# Altium PCB MainBoard.PcbDoc
Units mil, origin at the board's own origin, x right, y up, seen from the top; angles counter-clockwise.
Board outline 2100.54 x 998.96 mil, 2 copper layers (Top Layer, Bottom Layer), stack 27.8 mil thick; 13 components, 10 nets, 38 pads, 2 vias.
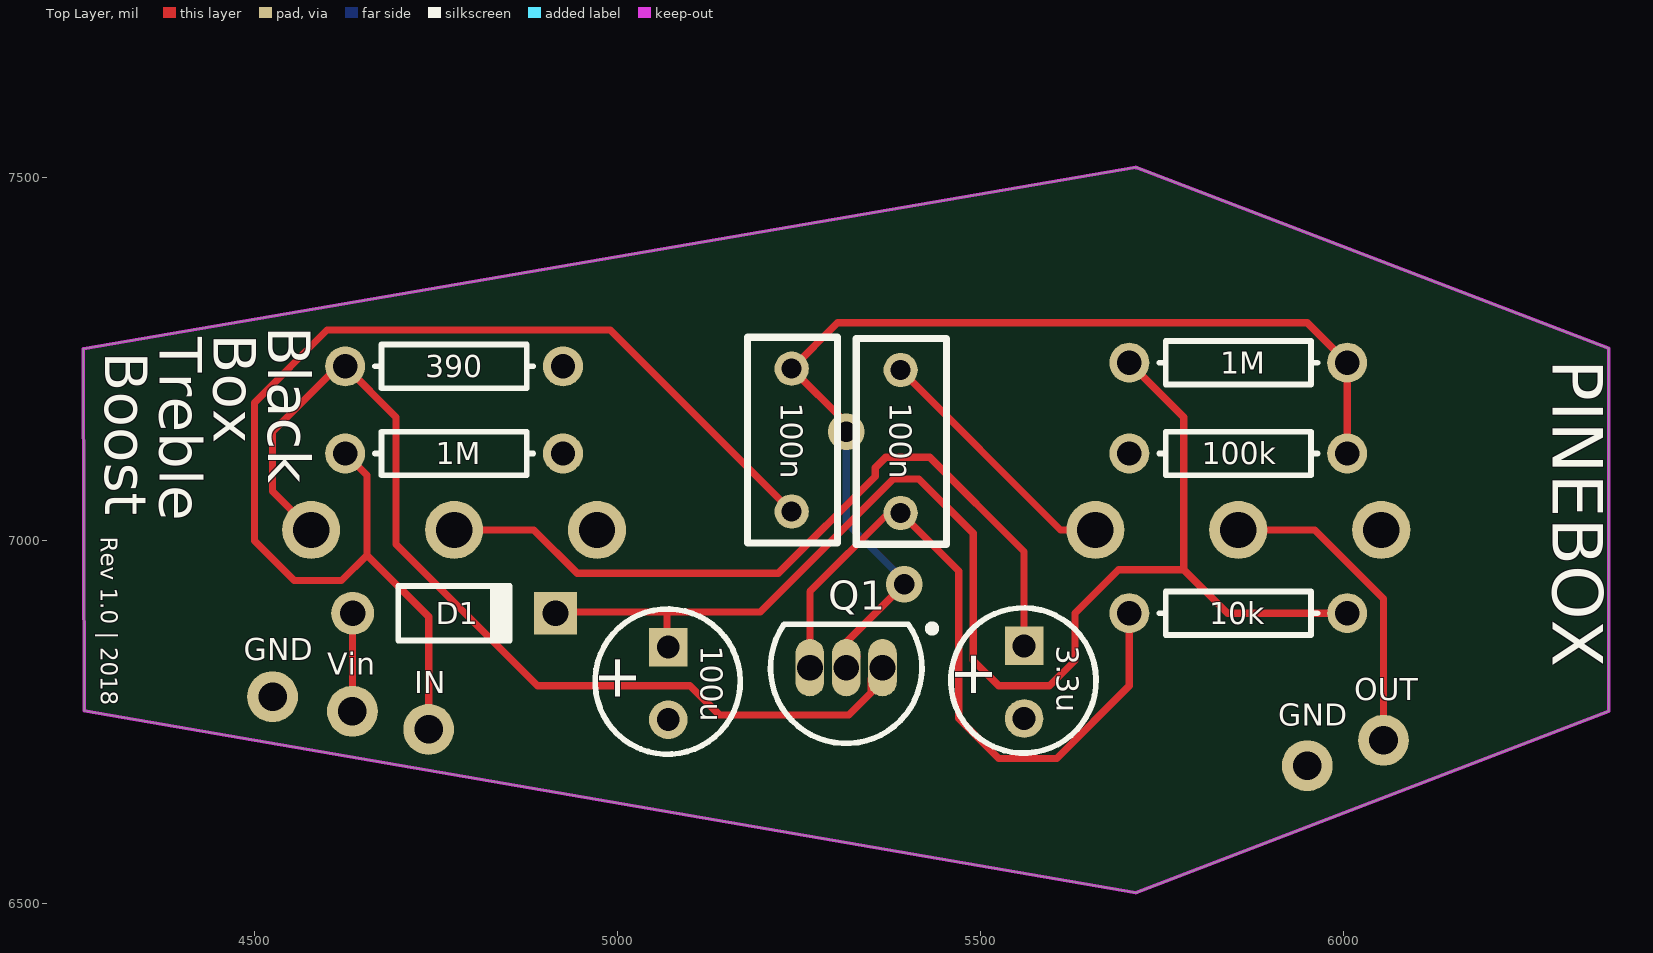
[diagram p0: Top Layer view]
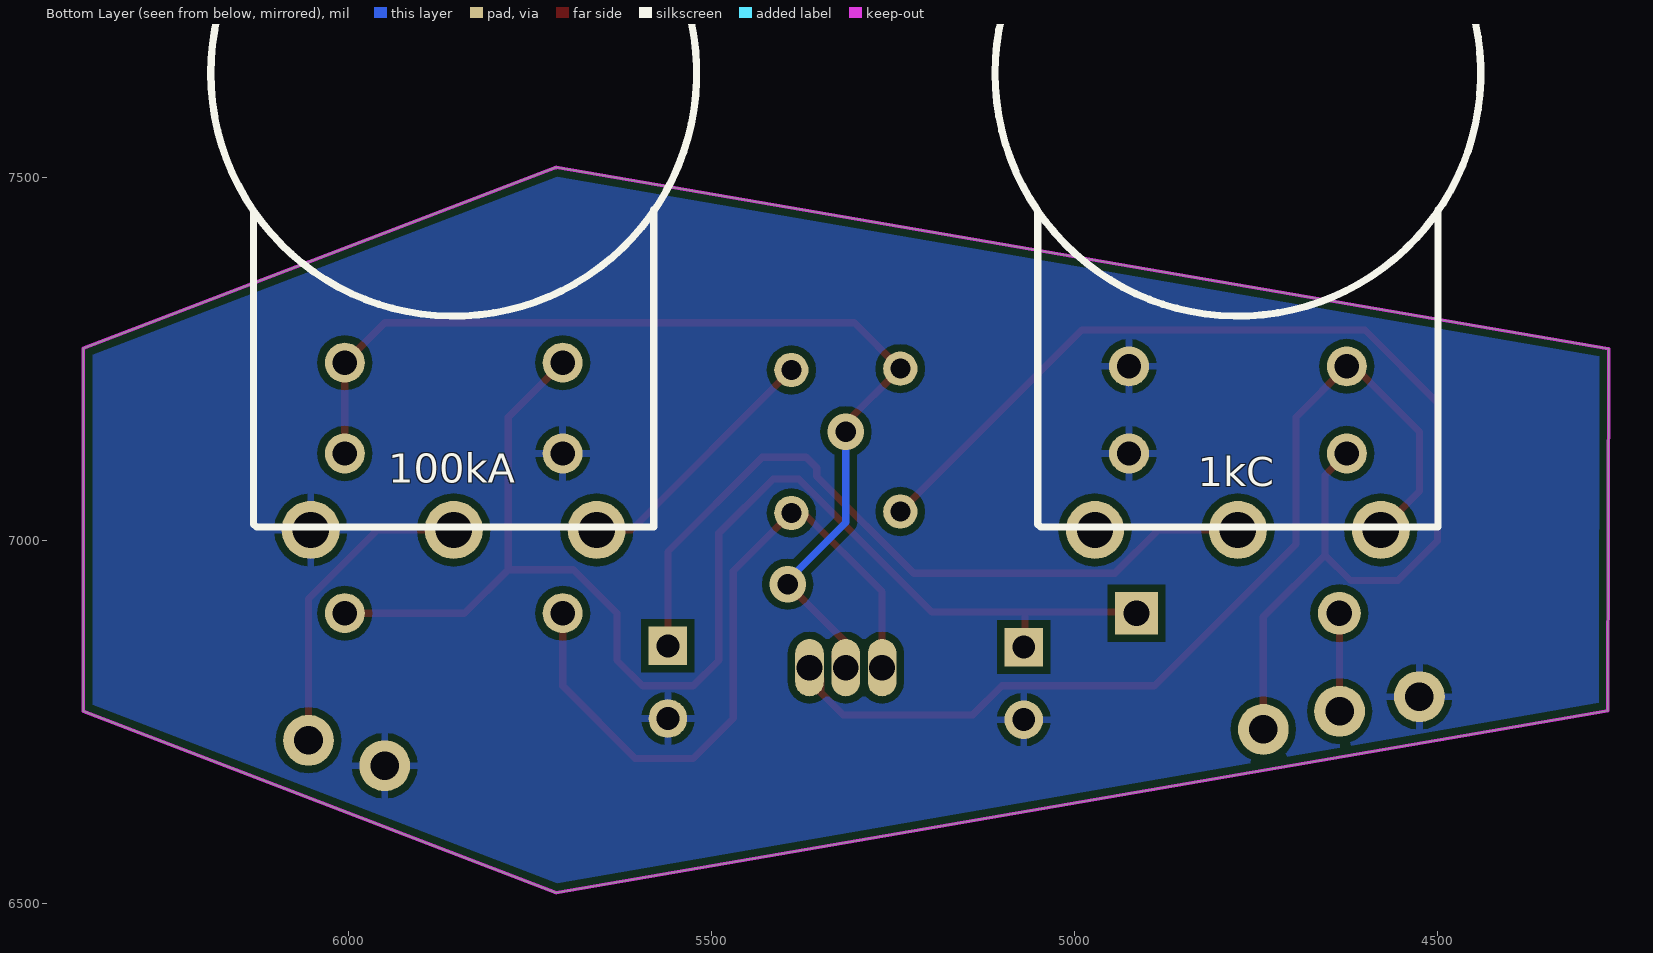
[diagram p1: Bottom Layer view, seen from below]

## Layer stack, top to bottom
Top Solder: solder mask 0.8, Solder Resist, Dk 3.5
Top Layer: signal copper 1.4
Dielectric 1: dielectric 25, FR-4, Dk 4.8
Bottom Layer: signal copper 1.4
Bottom Solder: solder mask 8, Solder Resist, Dk 3.5

## Board outline
4265.54,6765.77 5714.01,6515 6365,6765 6365,7265.11 5714.01,7513.96 4264.46,7264.34

## Design rules (kind name [scope] priority, off if disabled: settings)
Clearance [All] p1: gap=10 ignorepadtopadclearanceinfootprint=FALSE except(0: Arc-Hole Track-Hole SMDPad-Hole THPad-Hole Via-Hole Fill-Hole Poly-Hole Region-Hole Text-Hole)
ComponentClearance [All] p1: gap=0 collisioncheckmode=3 verticalgap=0 showdistances=FALSE
PolygonConnect [All] p1: connectstyle=Relief reliefconductorwidth=10 reliefentries=4 polygonreliefangle="90 Angle" airgapwidth=10
RoutingVias [All] p1: holewidth=28 width=50 viastyle="Through Hole" minholewidth=28 minwidth=50 maxholewidth=28 maxwidth=50
SilkToSilkClearance [All] p1: silktosilkclearance=8
SilkToSolderMaskClearance [IsPad] p1: minsilkscreentomaskgap=8 clearancetoexposedcopper=TRUE
SolderMaskExpansion [All] p1: expansion=4
Width [All] p1: maxlimit=10 minlimit=10 preferedwidth=10
27 further rules are at their usual default settings.

## Classes and differential pairs
component class TrebleBoost: 1kC 1M 3.3u 10k 100k 100kA 100n 100u 390 D1 Q1

## Components (designator, comment, footprint, x,y, rotation, side; value= is the part's Value field where it differs from the comment)
1kC "Pot-16mm" Pot-16mm 4775,7014.76 r180 bottom value=C1k (schematic designator VR1)
1M "Res1" AXIAL-0.3 4775,7120 r180 top value=1M (schematic designator R1)
1M "Res1" AXIAL-0.3 5855,7245 r180 top value=1M (schematic designator R2)
3.3u "Cap2" "Cap - Electrolytic" 5560,6805 r270 top value=2.2uF (schematic designator C4)
10k "Res1" AXIAL-0.3 5855,6900 r0 top value=10k (schematic designator R4)
100k "Res1" AXIAL-0.3 5855,7120 r0 top value=100k (schematic designator R3)
100kA "Pot-16mm" Pot-16mm 5855,7014.76 r180 bottom value=A10k (schematic designator VR2)
100n "Wima Capacitor" "Cap-0.2\"" 5240,7040 r90 top value=100n (schematic designator C3)
100n "Wima Capacitor" "Cap-0.2\"" 5390,7038.15 r90 top value=100n (schematic designator C2)
100u "Cap2" "Cap - Electrolytic" 5070,6803.43 r270 top value=100uF (schematic designator C1)
390 "Res1" AXIAL-0.3 4775,7240 r180 top value=390 (schematic designator R5)
D1 "1n5818" DO-35 4775,6900 r0 top
Q1 "2n5088" TO-226-AA 5315,6825 r90 top

## Footprints (in the part's own frame and the unit in brackets; to place one, negate y for a bottom-side part, rotate by r counter-clockwise, add the part's x,y. Pads: shape width x height; smd on the part's side, far side on the other; paste and mask are expansions set on the pad)
AXIAL-0.3 [mm] "Axial Device, Thru-Hole; 2 Leads; 0.3 in Pin Spacing"
  round 1.4 hole 0.85: 1(-3.81,0) 2(3.81,0)
  silkscreen extent -2.77,-0.76 2.77,0.76
"Cap - Electrolytic" [mm]
  rect 1.35x1.35 hole 0.8: 1(-1.27,0)
  round 1.35 hole 0.8: 2(1.27,0)
  silkscreen extent -2.6,-2.56 2.48,2.52
"Cap-0.2\"" [mm]
  round 1.2 hole 0.7: 1(0,0) 2(5,0)
  silkscreen extent -1.1,-1.6 6.1,1.55, body extent -1.1,-1.6 6.1,1.5, height 6.5
DO-35 [mm] "Diode, Axial; Body 3.8 x 1.9 mm (LxDia. max), Lead Dia. 0.53 mm (max)"
  round 1.5 hole 0.9: 1(-3.55,0)
  rect 1.5x1.5 hole 0.9: 2(3.55,0)
  silkscreen extent -1.95,-0.95 2.05,0.95
Pot-16mm [mil]
  round 80 hole 50: 1(-196.85,0) 2(0,0) 2(0,0) 3(196.85,0)
  round 0 hole 70: 6(0,610.24)
  silkscreen extent -335,4 334,964, body extent -335,-4 335,945, height 900
TO-226-AA [mm] "TO, Flat Index; 3 In-Line, Axial Leads; Body Dia. 4.8mm; Leads 0.55 x 0.51 mm (max)"
  oval 2x1 hole 0.9: 1(0,-1.27) 2(0,0) 3(0,1.27)
  silkscreen extent -2.65,-3.13 1.52,2.65, body extent -2.65,-2.66 1.52,2.66, height 5.33

## Part data
1M 1M 10k 100k 390: "Resistor", LatestRevisionDate=17-Jul-2002, LatestRevisionNote="Re-released for DXP Platform.", PackageDescription="Axial Device, Thru-Hole; 2 Leads; 0.3 in Pin Spacing", PackageReference=AXIAL-0.3, Publisher="Altium Limited"
  1M 1M 100k 390: Published=8-Jun-2000
3.3u 100u: "Capacitor", PackageDescription="Capacitor; 2 Leads", PackageReference=CAPR5-4X5, Published=23-Sep-2002, Publisher="Altium Limited"
D1: library part "Diode 1N914", "High Conductance Fast Diode", Code_JEDEC=DO-204-AH, ComponentLink1Description="Manufacturer Link", ComponentLink1URL=http://www.fairchildsemi.com/, ComponentLink2Description=Datasheet, ComponentLink2URL=http://www.fairchildsemi.com/ds/1N%2F1N4448.pdf, DatasheetVersion=1997, LatestRevisionDate=17-Jul-2002, LatestRevisionNote="Re-released for DXP Platform.", PackageDescription="Diode, Axial; Body 3.8 x 1.9 mm (LxDia. max), Lead Dia. 0.53 mm (max)", PackageReference=DO-35, Published=8-Jun-2000, Publisher="Altium Limited"
Q1: library part NPN, "NPN Bipolar Transistor", Code_JEDEC=TO-226-AA, LatestRevisionDate=17-Jul-2002, LatestRevisionNote="Re-released for DXP Platform.", PackageDescription="TO, Flat Index; 3 In-Line, Axial Leads; Body Dia. 4.8mm; Leads 0.55 x 0.51 mm (max)", PackageReference=TO-226-AA, Published=8-Jun-2000, Publisher="Altium Limited"

## Free pads (board coordinates)
  round 70 hole 39.37: 1(4525,6785) 1(4635,6765) 1(4740,6740) 1(5950,6690) 1(6055,6725)

## Via types
v1: diameter 50, hole 28, Top Layer to Bottom Layer, 2 vias

## Nets (pads, with @x,y where several pads share a name; then routed paths per layer and width w, separated by ;. In a path a pad name is that pad's centre, name@x,y a point inside that pad or via, vN(x,y) a via of type N, cw(c..) or ccw(c..) an arc to the next point about the centre after c; other vN are vias at no path point)
GND: 1M.1@4925,7120 3.3u.2 100k.1 100kA.1 100u.2 390.1 pad.1@4525,6785 pad.1@5950,6690 | length 20
  Top Layer w10: 100kA.1@6051.85,6994.76 100kA.1
IN: 1M.2@4625,7120 100n.1@5240,7040 pad.1@4740,6740 | length 1694.9
  Top Layer w10: 1M.2@4625,7120 4655,7090 4655,6980 ; pad.1@4740,6740 4740,6895 4655,6980 ; 100n.1@5240,7040 4990,7290 4600,7290 4500,7190 4500,7000 4555,6945 4620,6945 4655,6980
NetC2_1: 10k.1 100n.1@5390,7038.15 Q1.3 | length 990.3
  Top Layer w10: Q1.3 5265,6930 5373.15,7038.15 5390,7038.15 5470,6958.15 5470,6755 5525,6700 5605,6700 5705,6800 10k.1
NetC2_2: 100kA.3 100n.2@5390,7235 | length 359.4
  Top Layer w10: 100n.2@5390,7235 5610.24,7014.76 100kA.3
NetC3_2: 1M.1@6005,7245 100k.2 100n.2@5240,7236.85 Q1.2 | length 1470
  Top Layer w10: v1(5315,7150) 5315,7161.85 5240,7236.85 5303.15,7300 5950,7300 6005,7245 100k.2 ; Q1.2@5330.31,6840.31 Q1.2 5315,6860 v1(5395,6940)
  Bottom Layer w10: v1(5315,7150) 5315,7025.15 5314.85,7025.15 5395,6945 v1(5395,6940)
NetC4_1: 1kC.2 3.3u.1 | length 1066.9
  Top Layer w10: 1kC.2@4775,7014.76 4884.76,7014.76 4944.53,6955 5221.57,6955 5355,7088.43 5355,7100.38 5369.62,7115 5430,7115 5560,6985 3.3u.1
NetQ1_3: 1kC.3 390.2 Q1.1 | length 1373.8
  Top Layer w10: 1kC.3 4525,7067.91 4525,7150 4615,7240 390.2 4695,7170 4695,6995 4890,6800 5100,6800 5140,6760 5318.74,6760 5349.69,6790.95 5349.69,6809.69 Q1.1
OUT: 100kA.2 pad.1@6055,6725 | length 434.3
  Top Layer w10: 100kA.2@5855,7014.76 5960.24,7014.76 6055,6920 pad.1@6055,6725
VCC: 1M.2@5705,7245 10k.2 100u.1 D1.2 | length 1880
  Top Layer w10: D1.2 4916.61,6901.85 5196.7,6901.85 5379.85,7085 5415,7085 5490,7010 5490,6835 5525,6800 5595,6800 5630,6835 5630,6900 5690,6960 5780,6960 ; 5068.15,6900 5068.15,6855.28 100u.1 ; 1M.2@5705,7245 5780,7170 5780,6960 ; 10k.2 5840,6900 5780,6960
Vin: D1.1 pad.1@4635,6765 | length 135.1
  Top Layer w10: pad.1@4635,6765 4635.24,6765.24 D1.1
pads on no net: 1kC.1 1kC.6 100kA.6

## Polygon pours and split planes (outlines as drawn)
GND on Bottom Layer "Bottom Layer-GND" (solid, pour order 0): 4265,7265 5715,7514.95 6040,7385 6365,7265 6365,6765 6025.19,6634.5 5715,6515 5409.6,6567.7 4265,6765

## Keep-outs
Keep-Out Layer:
  the board outline again, w5

## Silkscreen, mask and mechanical layers (free items; w line width, h text height)
Top Overlay:
  text "Black" at 4500,7295 h100 r270
  text "Box" at 4425,7285 h100 r270
  text "Treble" at 4350,7280 h100 r270
  text "Boost" at 4275,7260 h100 r270
  text "PINEBOX" at 6265,7250 h120 r270
  text "Rev 1.0 | 2018" at 4280,7005 h40 r270
  text "GND" at 4485,6835 h30
  text "Vin" at 4600,6815 h30
  text "IN" at 4720,6790 h30
  text "OUT" at 6015,6780 h30
  text "GND" at 5910,6745 h30

## Text inside footprints (layer, text, board x,y; h text height)
3.3u: Top Overlay "+" at 5465,6850 h60 r270
100u: Top Overlay "+" at 4975,6845 h60 r270